# EAGLE board Light2021 (EAGLE 9.6.2)
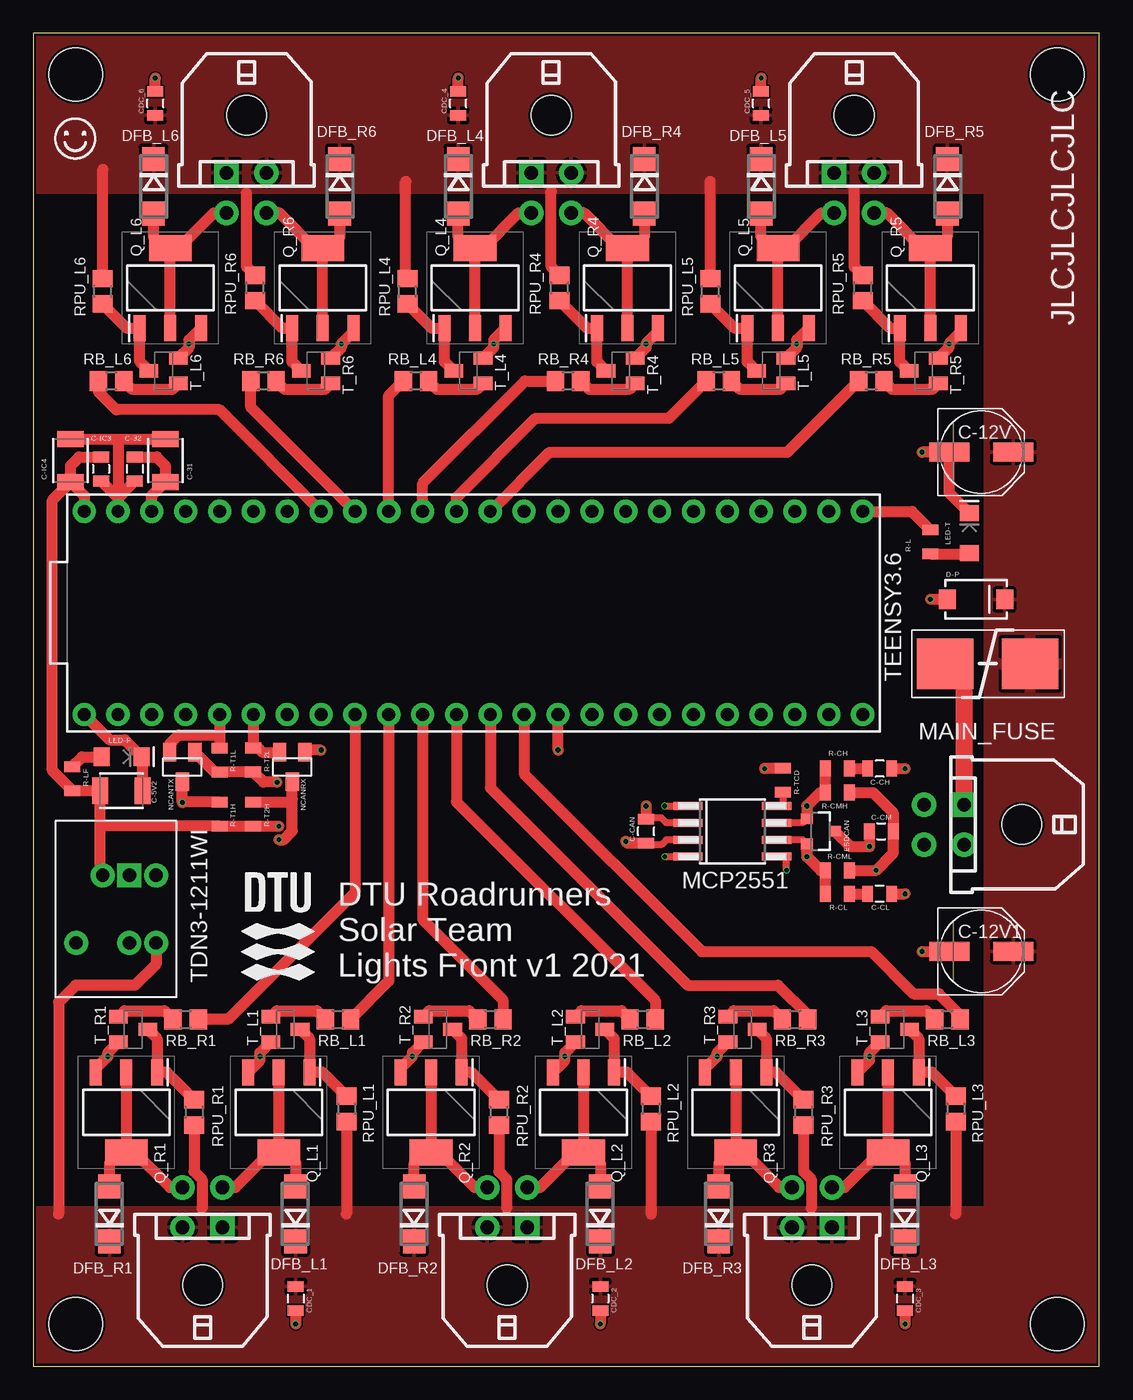
[diagram p0: board, top side]
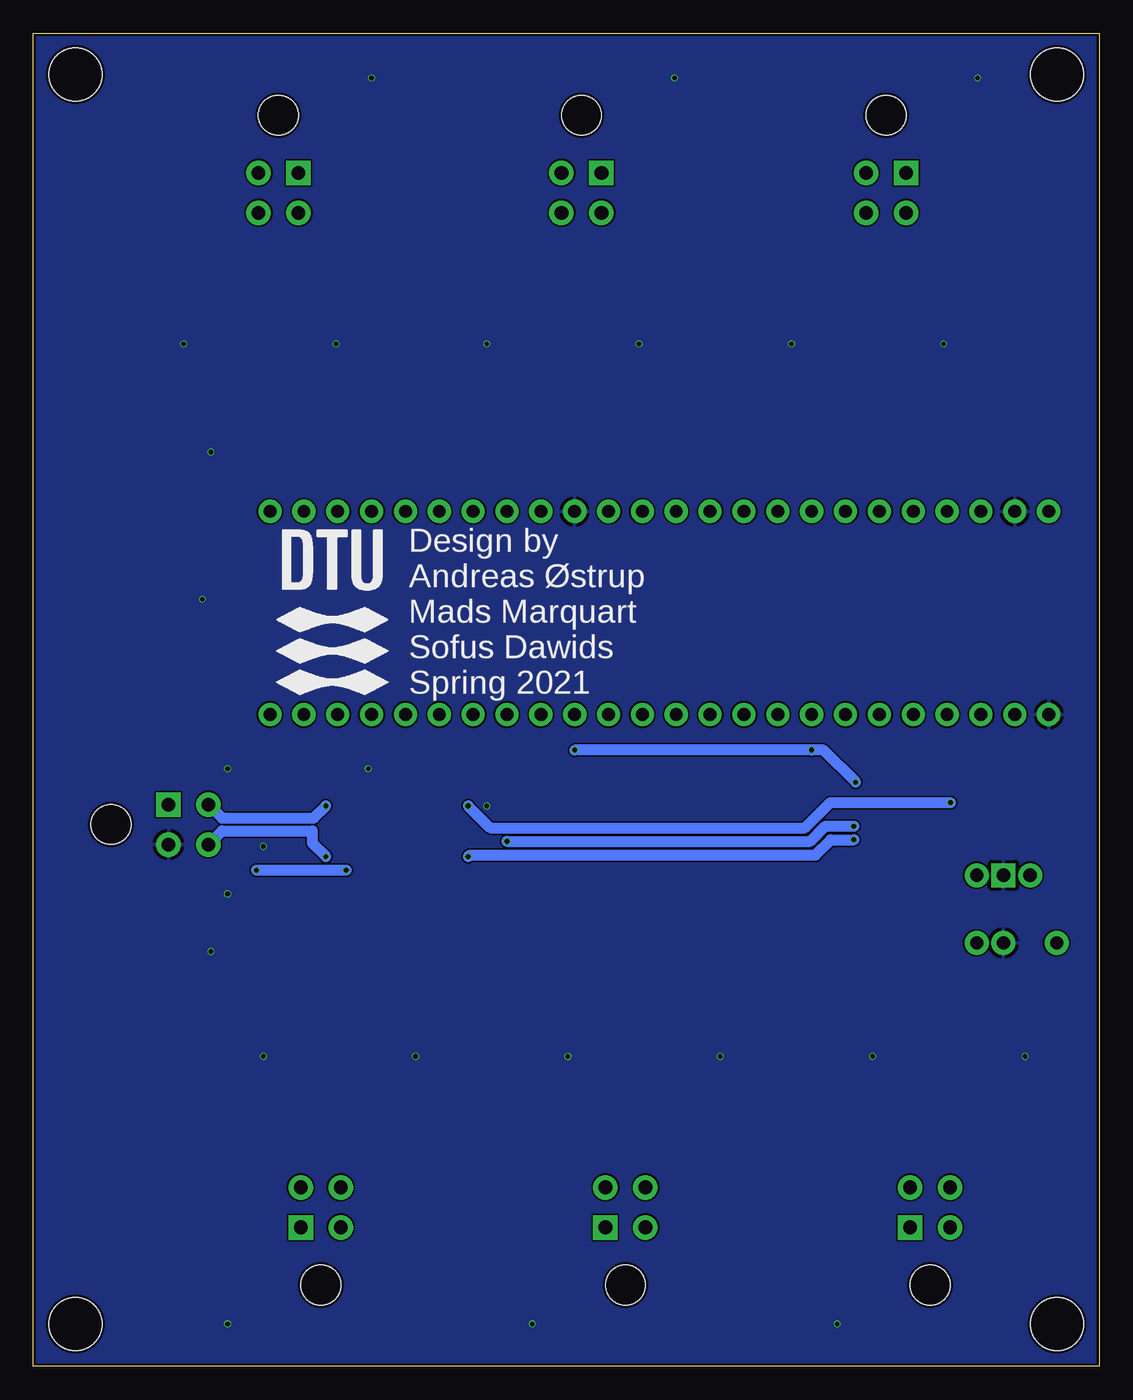
[diagram p1: board, bottom side, seen from below]

Size 79.99 x 100 mm. Coordinates in mm from the lower left corner, seen from the top.
Outline: 0,0 79.99,0 79.99,100 0,100 0,0
Copper layers (1*16): Top 0.035mm / dielectric 1.6mm / Bottom 0.035mm
Design rules "jlcpcb-2layers": minimum track width 5mil, minimum drill 0.3mm, track to track 5mil, track to pad 5mil, pad to pad 5mil, via to via 5mil, smd to smd 5mil, copper to edge 0.2mm, drill to drill 6mil, minimum pad ring 10mil, minimum via ring 3mil, stop-mask expansion 4mil, vias tented up to drill 0mil, thermal gap 10mil
Net classes: 1 diff_pairs: width 0.406 mm
Holes 4 mm at 3.17,3.17 76.83,3.17 76.83,96.9 3.17,96.9

## Footprints (pad centres in the part's own frame; a part is rotated, then mirrored left to right if it is on the bottom)
1210 = smd 1.2 x 2: 1 -1.6,0; 2 1.6,0
PANASONIC_D = smd 3 x 1.4: + 2.4,0; - -2.4,0
0805 = smd 0.8 x 1.2: 1 -0.9,0; 2 0.9,0
43045-0400 = drill 1.02 square: P$1 1.5,4.32 | drill 1.02: P$2 -1.5,4.32; P$3 1.5,7.32; P$4 -1.5,7.32 | hole 3: 0,0
SMA-DIODE = smd 1.27 x 1.47: A -2.15,0; C 2.15,0
DO214AC = smd 1.8 x 1.7: A 2.05,0; C -2.05,0
SOT23-3 = smd 0.8 x 0.9: 1 -0.95,-1; 2 0.95,-1; 3 0,1.1
LED-1206 = smd 1.2 x 1.4: A -1.5,0; C 1.5,0
SMF_OMNI-BLOK_FUSE_BLOCK = smd 4.242 x 3.81: PIN1 -3.175,0; PIN2 3.2,0
SO-08M = smd 0.6 x 2.2: 1 -1.905,-3.33; 2 -0.635,-3.33; 3 0.635,-3.33; 4 1.905,-3.33; 5 1.905,3.33; 6 0.635,3.33; 7 -0.635,3.33; 8 -1.905,3.33
SOT23 = smd 1 x 1.4: 1 -0.95,-1.1; 2 0.95,-1.1; 3 0,1.1
SOT230P700X180-4N = smd 1.95 x 0.9: 1 -3,2.3; 2 -3,0; 3 -3,-2.3 | smd 1.95 x 3.2: 4 3,0
R0805 = smd 1.3 x 1.5: 1 -0.95,0; 2 0.95,0
SOT23-BEC = smd 1 x 1.4: B -0.95,-1.1; C 0,1.1; E 0.95,-1.1
TDC3WI = drill 1 pad 1.6: NC 4.065,7.55; ONOFF 9.135,1.55; VIN+ 9.135,7.55; VIN- 9.135,5.55; VOUT+ 4.065,3.55 | drill 1 pad 1.6 square: VOUT- 4.065,5.55
TEENSY_3.6_DIL = drill 0.965: 0 -7.62,25.4; 1 -7.62,22.86; 2 -7.62,20.32; 3 -7.62,17.78; 3.3V1 7.62,22.86; 3.3V2 -7.62,-7.62; 4 -7.62,15.24; 5 -7.62,12.7; 6 -7.62,10.16; 7 -7.62,7.62; 8 -7.62,5.08; 9 -7.62,2.54; 10 -7.62,0; 11 -7.62,-2.54; 12 -7.62,-5.08; 13 7.62,-5.08; 14/A0 7.62,-2.54; 15/A1 7.62,0; 16/A2 7.62,2.54; 17/A3 7.62,5.08; 18/A4 7.62,7.62; 19/A5 7.62,10.16; 20/A6 7.62,12.7; 21/A7 7.62,15.24; 22/A8 7.62,17.78; 23/A9 7.62,20.32; 24 -7.62,-10.16; 25 -7.62,-12.7; 26 -7.62,-15.24; 27 -7.62,-17.78; 28 -7.62,-20.32; 29 -7.62,-22.86; 30 -7.62,-25.4; 31/A12 -7.62,-27.94; 32/A13 -7.62,-30.48; 33/A14 7.62,-30.48; 34/A15 7.62,-27.94; 35/A16 7.62,-25.4; 36/A17 7.62,-22.86; 37/A18 7.62,-20.32; 38/A19 7.62,-17.78; 39/A20 7.62,-15.24; A21 7.62,-12.7; A22 7.62,-10.16; AGND 7.62,25.4; GND -7.62,27.94; GND1 7.62,-7.62; VIN 7.62,27.94

## Placement (x,y rotation side)
C-5V2  4.7uF  [1210]  6.6,43.18 0 top
C-12V  220uF  [PANASONIC_D]  71.12,68.58 0 top
C-12V1  220uF  [PANASONIC_D]  71.12,31.11 0 top
C-31  4.7uF  [1210]  9.91,67.94 90 top
C-32  100nF  [0805]  7.62,67.31 270 top
C-CAN  100nF  [0805]  45.97,40.13 90 top
C-CH  220pF  [0805]  63.5,44.83 180 top
C-CL  220pF  [0805]  63.5,35.43 180 top
C-CM  NC  [0805]  63.63,40.13 0 top
C-IC3  100nF  [0805]  5.08,67.31 270 top
C-IC4  4.7uF  [1210]  2.79,67.94 90 top
CDC_1  100nF  [0805]  19.68,5.08 270 top
CDC_2  100nF  [0805]  42.55,5.08 270 top
CDC_3  100nF  [0805]  65.41,5.08 270 top
CDC_4  100nF  [0805]  31.88,94.74 90 top
CDC_5  100nF  [0805]  54.61,94.74 90 top
CDC_6  100nF  [0805]  9.14,94.74 90 top
CONN_OUT1  [43045-0400]  12.7,6.1 0 top
CONN_OUT2  [43045-0400]  35.56,6.1 0 top
CONN_OUT3  [43045-0400]  58.42,6.1 0 top
CONN_OUT4  [43045-0400]  38.86,93.85 180 top
CONN_OUT5  [43045-0400]  61.59,93.85 180 top
CONN_OUT6  [43045-0400]  16,93.85 180 top
D-P  ES1B  [SMA-DIODE]  70.74,57.53 0 top
DFB_L1  STTH102  [DO214AC]  19.68,11.43 90 top
DFB_L2  STTH102  [DO214AC]  42.55,11.43 90 top
DFB_L3  STTH102  [DO214AC]  65.41,11.43 90 top
DFB_L4  STTH102  [DO214AC]  31.88,88.52 270 top
DFB_L5  STTH102  [DO214AC]  54.61,88.52 270 top
DFB_L6  STTH102  [DO214AC]  9.02,88.52 270 top
DFB_R1  STTH102  [DO214AC]  5.71,11.43 90 top
DFB_R2  STTH102  [DO214AC]  28.57,11.43 90 top
DFB_R3  STTH102  [DO214AC]  51.44,11.43 90 top
DFB_R4  STTH102  [DO214AC]  45.85,88.52 270 top
DFB_R5  STTH102  [DO214AC]  68.58,88.52 270 top
DFB_R6  STTH102  [DO214AC]  22.99,88.52 270 top
ESDCAN  PESD1CAN  [SOT23-3]  59.05,40.13 270 top
LED-F  RED  [LED-1206]  6.63,45.72 0 top
LED-T  RED  [LED-1206]  70.23,62.51 90 top
MAIN_FUSE  SMF_OMNI-BLOK_FUSE_BLOCK  [SMF_OMNI-BLOK_FUSE_BLOCK]  71.63,52.7 180 top
MCP2551  MCP2551  [SO-08M]  52.45,40.13 270 top
NCANRX  BSS138  [SOT23]  19.43,44.96 180 top
NCANTX  BSS138  [SOT23]  11.18,44.96 180 top
P_D  [43045-0400]  74.17,40.64 90 top
Q_L1  BUK9832-55A  [SOT230P700X180-4N]  18.41,19.05 270 top
Q_L2  BUK9832-55A  [SOT230P700X180-4N]  41.27,19.05 270 top
Q_L3  BUK9832-55A  [SOT230P700X180-4N]  64.14,19.05 270 top
Q_L4  BUK9832-55A  [SOT230P700X180-4N]  33.15,80.9 90 top
Q_L5  BUK9832-55A  [SOT230P700X180-4N]  55.88,80.9 90 top
Q_L6  BUK9832-55A  [SOT230P700X180-4N]  10.29,80.9 90 top
Q_R1  BUK9832-55A  [SOT230P700X180-4N]  6.99,19.05 270 top
Q_R2  BUK9832-55A  [SOT230P700X180-4N]  29.84,19.05 270 top
Q_R3  BUK9832-55A  [SOT230P700X180-4N]  52.7,19.05 270 top
Q_R4  BUK9832-55A  [SOT230P700X180-4N]  44.58,80.9 90 top
Q_R5  BUK9832-55A  [SOT230P700X180-4N]  67.31,80.9 90 top
Q_R6  BUK9832-55A  [SOT230P700X180-4N]  21.72,80.9 90 top
R-CH  100  [0805]  60.34,44.83 180 top
R-CL  100  [0805]  60.34,35.43 180 top
R-CMH  NC  [0805]  60.33,43.04 180 top
R-CML  NC  [0805]  60.33,37.2 0 top
R-L  560  [0805]  67.31,61.85 90 top
R-LF  1.2k  [0805]  2.92,44.08 270 top
R-T1H  10k  [0805]  13.97,41.41 270 top
R-T1L  10k  [0805]  13.97,45.47 270 top
R-T2H  10k  [0805]  16.51,41.41 270 top
R-T2L  10k  [0805]  16.51,45.48 270 top
R-TCD  4.7k  [0805]  56.26,43.95 270 top
RB_L1  4k7  [R0805]  22.86,26.04 0 top
RB_L2  4k7  [R0805]  45.72,26.04 0 top
RB_L3  4k7  [R0805]  68.58,26.04 0 top
RB_L4  4k7  [R0805]  28.7,73.91 180 top
RB_L5  4k7  [R0805]  51.44,73.91 180 top
RB_L6  4k7  [R0805]  5.84,73.91 180 top
RB_R1  4k7  [R0805]  11.43,26.04 0 top
RB_R2  4k7  [R0805]  34.29,26.04 0 top
RB_R3  4k7  [R0805]  57.15,26.04 0 top
RB_R4  4k7  [R0805]  40.13,73.91 180 top
RB_R5  4k7  [R0805]  62.87,73.91 180 top
RB_R6  4k7  [R0805]  17.27,73.91 180 top
RPU_L1  10k  [R0805]  23.5,19.3 270 top
RPU_L2  10k  [R0805]  46.35,19.3 270 top
RPU_L3  10k  [R0805]  69.22,19.3 270 top
RPU_L4  10k  [R0805]  28.07,80.64 90 top
RPU_L5  10k  [R0805]  50.8,80.64 90 top
RPU_L6  10k  [R0805]  5.21,80.64 90 top
RPU_R1  10k  [R0805]  12.06,19.05 270 top
RPU_R2  10k  [R0805]  34.92,19.05 270 top
RPU_R3  10k  [R0805]  57.78,19.05 270 top
RPU_R4  10k  [R0805]  39.5,80.9 90 top
RPU_R5  10k  [R0805]  62.23,80.9 90 top
RPU_R6  10k  [R0805]  16.64,80.9 90 top
T_L1  BC846B  [SOT23-BEC]  18.92,25.27 270 top
T_L2  BC846B  [SOT23-BEC]  41.78,25.27 270 top
T_L3  BC846B  [SOT23-BEC]  64.64,25.27 270 top
T_L4  BC846B  [SOT23-BEC]  32.64,74.68 90 top
T_L5  BC846B  [SOT23-BEC]  55.37,74.68 90 top
T_L6  BC846B  [SOT23-BEC]  9.78,74.68 90 top
T_R1  BC846B  [SOT23-BEC]  7.49,25.27 270 top
T_R2  BC846B  [SOT23-BEC]  30.35,25.27 270 top
T_R3  BC846B  [SOT23-BEC]  53.21,25.27 270 top
T_R4  BC846B  [SOT23-BEC]  44.07,74.68 90 top
T_R5  BC846B  [SOT23-BEC]  66.8,74.68 90 top
T_R6  BC846B  [SOT23-BEC]  21.21,74.68 90 top
TDN3-1211WI  TDN3WI  [TDC3WI]  1.65,40.89 270 top
TEENSY3.6  TEENSY_3.6_DIL  [TEENSY_3.6_DIL]  31.75,56.52 90 top
U$1  [DTU-SMALL-5MM]  18.41,33.66 0 top
U$2  [SMILEY]  3.17,92.08 0 top
U$3  [DTU-MEDIUM-9MM-BOTTOM]  57.53,57.28 0 bottom

## Library data of the parts
C-5V2 C-31 C-32 C-CAN C-CH C-CL C-CM C-IC3 C-IC4 CDC_1-CDC_6 = SparkFun-Passives
C-12V C-12V1 = rcl
CONN_OUT1-CONN_OUT6 P_D = con-molex-micro-fit-3_0
D-P = SparkFun-DiscreteSemi
DFB_L1-DFB_L6 DFB_R1-DFB_R6 = diode
ESDCAN = SparkFun-DiscreteSemi; PROD_ID: DIO-12501
LED-F LED-T = SparkFun-LED
MAIN_FUSE = SMF_OMNI-BLOK_FUSE_BLOCK
MCP2551 = skpang_lib
NCANRX NCANTX = SparkFun-DiscreteSemi; PROD_ID: TRANS-08345
Q_L1-Q_L6 Q_R1-Q_R6 = custom; DESCRIPTION: MOSFET N-channel TrenchMOS logic level FET; HEIGHT: 1.8mm; MANUFACTURER_NAME: Nexperia; MANUFACTURER_PART_NUMBER: BUK9832-55A/CUX; MOUSER_PART_NUMBER: 771-BUK9832-55A/CUX; MOUSER_PRICE-STOCK: https://www.mouser.co.uk/ProductDetail/Nexperia/BUK9832-55A-CUX?qs=Yna0arPQ0CQmqEEmts1kDA%3D%3D
R-CH R-CL R-CMH R-CML R-L R-LF R-T1H R-T1L R-T2H R-T2L R-TCD = SparkFun-Resistors
RB_L1-RB_L6 RB_R1-RB_R6 RPU_L1-RPU_L6 RPU_R1-RPU_R6 = rcl; SPICEPREFIX: R
T_L1-T_L6 T_R1-T_R6 = transistor
TDN3-1211WI = TracoTDN3WI
TEENSY3.6 = Teensy_3_and_LC_Series_Boards_v1.4
U$1-U$3 = Logos

## Nets
+3V3: C-31.1 C-32.1 NCANRX.1 NCANTX.1 R-T1L.2 R-T2L.2 TEENSY3.6.3.3V1 TEENSY3.6.3.3V2
+5V: C-5V2.1 C-CAN.1 C-IC3.1 C-IC4.1 MCP2551.3 R-LF.2 R-T1H.2 R-T2H.2 TDN3-1211WI.VOUT+ TEENSY3.6.VIN
+12V: C-12V1.+ C-12V.+ CDC_1.1 CDC_2.1 CDC_3.1 CDC_4.1 CDC_5.1 CDC_6.1 CONN_OUT1.P$1 CONN_OUT1.P$2 CONN_OUT2.P$1 CONN_OUT2.P$2 CONN_OUT3.P$1 CONN_OUT3.P$2 CONN_OUT4.P$1 CONN_OUT4.P$2 CONN_OUT5.P$1 CONN_OUT5.P$2 CONN_OUT6.P$1 CONN_OUT6.P$2 D-P.C DFB_L1.C DFB_L2.C DFB_L3.C DFB_L4.C DFB_L5.C DFB_L6.C DFB_R1.C DFB_R2.C DFB_R3.C DFB_R4.C DFB_R5.C DFB_R6.C MAIN_FUSE.PIN1 RPU_L1.2 RPU_L2.2 RPU_L3.2 RPU_L4.2 RPU_L5.2 RPU_L6.2 RPU_R1.2 RPU_R2.2 RPU_R3.2 RPU_R4.2 RPU_R5.2 RPU_R6.2 TDN3-1211WI.VIN+
CAN-RXD: MCP2551.4 NCANRX.3 R-T2H.1
CAN-RXD-3V3: NCANRX.2 R-T2L.1 TEENSY3.6.4
CAN-TXD: MCP2551.1 NCANTX.3 R-T1H.1
CAN-TXD-3V3: NCANTX.2 R-T1L.1 TEENSY3.6.3
CANH [diff_pairs]: ESDCAN.1 MCP2551.7 P_D.P$3 R-CH.2 R-CMH.2
CANL [diff_pairs]: ESDCAN.2 MCP2551.6 P_D.P$4 R-CL.2 R-CML.1
CLK: TEENSY3.6.13
GND: C-5V2.2 C-12V1.- C-12V.- C-31.2 C-32.2 C-CAN.2 C-CH.1 C-CL.1 C-CM.1 C-IC3.2 C-IC4.2 CDC_1.2 CDC_2.2 CDC_3.2 CDC_4.2 CDC_5.2 CDC_6.2 D-P.A ESDCAN.3 LED-F.C LED-T.C MCP2551.2 P_D.P$2 Q_L1.3 Q_L2.3 Q_L3.3 Q_L4.3 Q_L5.3 Q_L6.3 Q_R1.3 Q_R2.3 Q_R3.3 Q_R4.3 Q_R5.3 Q_R6.3 R-TCD.1 T_L1.E T_L2.E T_L3.E T_L4.E T_L5.E T_L6.E T_R1.E T_R2.E T_R3.E T_R4.E T_R5.E T_R6.E TDN3-1211WI.VIN- TDN3-1211WI.VOUT- TEENSY3.6.AGND TEENSY3.6.GND TEENSY3.6.GND1
N$1: LED-T.A R-L.1
N$6: C-CM.2 MCP2551.5 R-CMH.1 R-CML.2
N$7: RB_L1.1 T_L1.B
N$8: Q_L1.1 RPU_L1.1 T_L1.C
N$9: RB_R1.1 T_R1.B
N$10: Q_R1.1 RPU_R1.1 T_R1.C
N$11: RB_L2.1 T_L2.B
N$12: LED-F.A R-LF.1
N$13: Q_L2.1 RPU_L2.1 T_L2.C
N$14: RB_R2.1 T_R2.B
N$15: Q_R2.1 RPU_R2.1 T_R2.C
N$16: RB_L3.1 T_L3.B
N$17: Q_L3.1 RPU_L3.1 T_L3.C
N$18: RB_R3.1 T_R3.B
N$19: Q_R3.1 RPU_R3.1 T_R3.C
N$24: RB_L4.1 T_L4.B
N$25: C-CL.2 R-CL.1
N$26: C-CH.2 R-CH.1
N$27: Q_L4.1 RPU_L4.1 T_L4.C
N$28: RB_R4.1 T_R4.B
N$29: Q_R4.1 RPU_R4.1 T_R4.C
N$34: RB_L5.1 T_L5.B
N$35: Q_L5.1 RPU_L5.1 T_L5.C
N$36: RB_R5.1 T_R5.B
N$37: Q_R5.1 RPU_R5.1 T_R5.C
N$42: RB_L6.1 T_L6.B
N$43: Q_L6.1 RPU_L6.1 T_L6.C
N$44: RB_R6.1 T_R6.B
N$45: Q_R6.1 RPU_R6.1 T_R6.C
OUT_L1: RB_L1.2 TEENSY3.6.8
OUT_L2: RB_L2.2 TEENSY3.6.10
OUT_L3: RB_L3.2 TEENSY3.6.12
OUT_L4: RB_L4.2 TEENSY3.6.17/A3
OUT_L5: RB_L5.2 TEENSY3.6.15/A1
OUT_L6: RB_L6.2 TEENSY3.6.19/A5
OUT_R1: RB_R1.2 TEENSY3.6.7
OUT_R2: RB_R2.2 TEENSY3.6.9
OUT_R3: RB_R3.2 TEENSY3.6.11
OUT_R4: RB_R4.2 TEENSY3.6.16/A2
OUT_R5: RB_R5.2 TEENSY3.6.14/A0
OUT_R6: RB_R6.2 TEENSY3.6.18/A4
OUTIO_L1: CONN_OUT1.P$3 DFB_L1.A Q_L1.2 Q_L1.4
OUTIO_L2: CONN_OUT2.P$3 DFB_L2.A Q_L2.2 Q_L2.4
OUTIO_L3: CONN_OUT3.P$3 DFB_L3.A Q_L3.2 Q_L3.4
OUTIO_L4: CONN_OUT4.P$3 DFB_L4.A Q_L4.2 Q_L4.4
OUTIO_L5: CONN_OUT5.P$3 DFB_L5.A Q_L5.2 Q_L5.4
OUTIO_L6: CONN_OUT6.P$3 DFB_L6.A Q_L6.2 Q_L6.4
OUTIO_R1: CONN_OUT1.P$4 DFB_R1.A Q_R1.2 Q_R1.4
OUTIO_R2: CONN_OUT2.P$4 DFB_R2.A Q_R2.2 Q_R2.4
OUTIO_R3: CONN_OUT3.P$4 DFB_R3.A Q_R3.2 Q_R3.4
OUTIO_R4: CONN_OUT4.P$4 DFB_R4.A Q_R4.2 Q_R4.4
OUTIO_R5: CONN_OUT5.P$4 DFB_R5.A Q_R5.2 Q_R5.4
OUTIO_R6: CONN_OUT6.P$4 DFB_R6.A Q_R6.2 Q_R6.4
RS: MCP2551.8 R-TCD.2
TESTLED: R-L.2 TEENSY3.6.33/A14
VDD: MAIN_FUSE.PIN2 P_D.P$1

## Tracks (layer width: path | path; a pad name or v marks a point on that pad's centre or on a via)
+3V3  (via drill 0.35)
  Top 0.813: v21.59,46.23 20.55,46.23 NCANRX.1 | v18.29,43.81 17.27,43.81 R-T2L.2 R-T1L.2 13.62,44.57 NCANTX.1 | v39.37,46.23 TEENSY3.6.3.3V2 | TEENSY3.6.3.3V1 8.89,65.33 C-31.1 9.91,67.56 9.26,68.21 C-32.1
  Bottom 0.813: v39.37,46.23 v21.59,46.23 20.7,46.23 v18.29,43.81
+5V  (via drill 0.35)
  Top 0.508: MCP2551.3 47.5,39.5 47.12,39.12 46.09,39.12 C-CAN.1
  Top 0.813: C-IC4.1 2.79,67.56 3.44,68.21 C-IC3.1 | C-IC4.1 3.81,65.33 TEENSY3.6.VIN | C-IC4.1 1.42,64.97 1.42,44.68 R-LF.2 C-5V2.1 5,40.64 | TDN3-1211WI.VOUT+ 5,37.03 5,40.64 | C-CAN.1 44.59,39.23 v44.45,39.37 | v18.41,40.51 R-T2H.2 R-T1H.2 5.13,40.51 5,40.64
  Bottom 0.813: v44.45,39.37 21.7,39.37 20.56,40.51 v18.41,40.51
+12V
  Top 0.813: RPU_L6.2 5.21,89.79 | TDN3-1211WI.VIN+ 9.2,30.16 7.62,28.57 3.17,28.57 1.91,27.3 1.91,11.43 | RPU_L3.2 69.22,11.43 | RPU_R3.2 57.78,14.6 58.37,14.02 58.37,11.86 | RPU_L2.2 46.35,11.43 | RPU_R2.2 34.92,14.6 35.51,14.02 35.51,11.86 | RPU_L1.2 23.5,11.43 | RPU_R1.2 12.06,14.6 12.65,14.02 12.65,11.86 | RPU_L4.2 27.94,81.72 27.94,88.9 | RPU_L5.2 50.8,88.9 | RPU_R5.2 61.59,82.48 61.59,88.27 | RPU_R4.2 38.86,82.48 38.86,88.14 | RPU_R6.2 16,82.48 16,88.01
  pour Top: 0,11.94 26.67,11.94 26.67,0 0,0
  pour Top: 24.77,11.94 49.53,11.94 49.53,0 24.77,0
  pour Top: 47.62,11.94 72.39,11.94 72.39,0 47.62,0
  pour Top: 49.66,88.01 24.89,88.01 24.89,99.95 49.66,99.95
  pour Top: 72.39,88.01 47.62,88.01 47.62,99.95 72.39,99.95
  pour Top: 26.8,88.01 -0.51,88.01 -0.51,99.95 26.8,99.95
  pour Top (rank 2): 71.37,-2.41 82.55,-2.41 82.55,100.97 71.37,100.97
  pour Top: 71.88,55.88 78.11,55.88 78.11,49.53 71.88,49.53
CAN-RXD  (via drill 0.35)
  Top 0.508: v47.37,38.23 MCP2551.4
  Top 0.813: v18.41,39.5 18.76,39.5 19.43,40.16 19.43,42.55 | 19.43,42.55 NCANRX.3 | R-T2H.1 19.2,42.31 19.43,42.55
  Bottom 0.813: v47.37,38.23 47.24,38.35 21.3,38.35 20.16,39.5 v18.41,39.5
CAN-RXD-3V3
  Top 0.813: NCANRX.2 17.21,46.06 16.89,46.38 R-T2L.1 TEENSY3.6.4
CAN-TXD  (via drill 0.35)
  Top 0.508: v47.37,42.04 MCP2551.1
  Top 0.813: R-T1H.1 11.2,42.31 v11.18,42.29 NCANTX.3
  Bottom 0.813: v47.37,42.04 45.72,40.39 22.1,40.39 20.19,42.29 v11.18,42.29
CAN-TXD-3V3
  Top 0.813: TEENSY3.6.3 13.97,47.37 | 13.97,47.37 R-T1L.1 | NCANTX.2 10.23,46.67 10.92,47.37 13.97,47.37
CANH  (via drill 0.35)
  Top 0.508: ESDCAN.1 57.74,40.77 MCP2551.7
  Top 0.813: R-CH.2 59.42,44.82 R-CMH.2 59.04,43.04 v58.04,42.04 58.05,42.02 ESDCAN.1
  Bottom 0.813: P_D.P$3 65.83,41.12 58.95,41.12 v58.04,42.04
CANL  (via drill 0.35)
  Top 0.508: ESDCAN.2 57.74,39.5 MCP2551.6
  Top 0.813: R-CL.2 R-CML.1 | R-CML.1 | ESDCAN.2 58.05,38.57 58.04,38.55 v58.04,38.23 59.08,37.19 R-CML.1
  Bottom 0.813: P_D.P$4 65.83,40.16 59.05,40.16 59.05,39.24 v58.04,38.23
GND  (via drill 0.35)
  Top 0.508: C-CAN.2 46.09,41.15 47.12,41.15 47.5,40.77 MCP2551.2
  Top 0.813: Q_R1.3 4.68,22.34 v5.59,23.24 5.59,23.52 T_R1.E | Q_L1.3 17.02,22.95 v17.02,23.24 17.02,23.52 T_L1.E | Q_R2.3 27.55,22.34 v28.45,23.24 28.45,23.52 T_R2.E | Q_L2.3 39.88,22.95 v39.88,23.24 39.88,23.52 T_L2.E | Q_R3.3 50.41,22.34 v51.31,23.24 51.31,23.52 T_R3.E | Q_L3.3 62.74,22.95 v62.74,23.24 62.74,23.52 T_L3.E | Q_R4.3 46.88,77.61 v45.97,76.71 45.97,76.43 T_R4.E | Q_L4.3 34.54,77 v34.54,76.71 34.54,76.43 T_L4.E | Q_R5.3 69.61,77.61 v68.71,76.71 68.71,76.43 T_R5.E | Q_L5.3 57.28,77 v57.28,76.71 57.28,76.43 T_L5.E | Q_R6.3 24.02,77.61 v23.11,76.71 23.11,76.43 T_R6.E | Q_L6.3 11.68,77 v11.68,76.71 11.68,76.43 T_L6.E | D-P.A v67.31,57.53 | v66.67,68.58 C-12V.- 68.72,65.52 LED-T.C | ESDCAN.3 61.3,38.99 v62.74,38.99 C-CM.1 | v45.97,42.04 C-CAN.2 | C-IC3.2 6.35,65.14 | 6.35,65.14 TEENSY3.6.AGND | C-32.2 6.35,65.14 | C-IC4.2 6.35,69.55 | 6.35,69.55 C-31.2 | 6.35,69.55 6.35,65.14 | C-5V2.2 8.2,45.64 LED-F.C 6.86,46.99 5.71,46.99 TEENSY3.6.GND | C-CH.1 v65.41,44.83 | C-CL.1 v65.41,35.43 | R-TCD.1 54.89,44.85 v54.86,44.83 | v66.67,31.11 C-12V1.- | CDC_5.2 v54.61,96.65 | CDC_4.2 v31.88,96.65 | CDC_6.2 v9.14,96.65 | CDC_1.2 v19.68,3.17 | CDC_2.2 v42.55,3.17 | CDC_3.2 v65.41,3.17
  pour Bottom: -0.64,100.97 80.64,100.97 80.64,-1.91 -0.64,-1.91
N$1
  Top 0.813: R-L.1 70.17,60.95 LED-T.A
N$6  (via drill 0.35)
  Top 0.508: v56.52,37.21 56.52,38.1 56.39,38.23 MCP2551.5
  Top 0.813: R-CMH.1 63,43.04 64.53,41.52 C-CM.2 64.53,38.49 v63.25,37.21 63.23,37.2 R-CML.2
  Bottom 0.813: v56.52,37.21 v63.25,37.21
N$7
  Top 0.813: T_L1.B 18.27,26.67 21.27,26.67 RB_L1.1
N$8
  Top 0.813: T_L1.C 20.71,24.58 Q_L1.1 21.7,22.05 RPU_L1.1
N$9
  Top 0.813: T_R1.B 6.84,26.67 9.85,26.67 RB_R1.1
N$10
  Top 0.813: T_R1.C 9.29,24.58 Q_R1.1 10.02,22.05 RPU_R1.1
N$11
  Top 0.813: T_L2.B 41.13,26.67 44.13,26.67 RB_L2.1
N$12
  Top 0.813: R-LF.1 3.66,45.72 LED-F.A
N$13
  Top 0.813: T_L2.C 43.58,24.58 Q_L2.1 44.56,22.05 RPU_L2.1
N$14
  Top 0.813: T_R2.B 29.7,26.67 32.7,26.67 RB_R2.1
N$15
  Top 0.813: T_R2.C 32.15,24.58 Q_R2.1 32.88,22.05 RPU_R2.1
N$16
  Top 0.813: T_L3.B 63.99,26.67 67,26.67 RB_L3.1
N$17
  Top 0.813: T_L3.C 66.44,24.58 Q_L3.1 67.42,22.05 RPU_L3.1
N$18
  Top 0.813: T_R3.B 52.56,26.67 55.56,26.67 RB_R3.1
N$19
  Top 0.813: T_R3.C 55.01,24.58 Q_R3.1 55.73,22.05 RPU_R3.1
N$24
  Top 0.813: T_L4.B 33.29,73.28 30.29,73.28 RB_L4.1
N$25
  Top 0.813: R-CL.1 C-CL.2
N$26
  Top 0.813: R-CH.1 C-CH.2
N$27
  Top 0.813: T_L4.C 30.85,75.37 Q_L4.1 29.86,77.9 RPU_L4.1
N$28
  Top 0.813: T_R4.B 44.72,73.28 41.72,73.28 RB_R4.1
N$29
  Top 0.813: T_R4.C 42.28,75.37 Q_R4.1 41.55,77.9 RPU_R4.1
N$34
  Top 0.813: T_L5.B 56.02,73.28 53.02,73.28 RB_L5.1
N$35
  Top 0.813: T_L5.C 53.58,75.37 Q_L5.1 52.6,77.9 RPU_L5.1
N$36
  Top 0.813: T_R5.B 67.45,73.28 64.45,73.28 RB_R5.1
N$37
  Top 0.813: T_R5.C 65.01,75.37 Q_R5.1 64.28,77.9 RPU_R5.1
N$42
  Top 0.813: T_L6.B 10.43,73.28 7.43,73.28 RB_L6.1
N$43
  Top 0.813: T_L6.C 7.99,75.37 Q_L6.1 7,77.9 RPU_L6.1
N$44
  Top 0.813: T_R6.B 21.86,73.28 18.86,73.28 RB_R6.1
N$45
  Top 0.813: T_R6.C 19.42,75.37 Q_R6.1 18.69,77.9 RPU_R6.1
OUT_L1
  Top 0.813: RB_L1.2 26.67,28.89 TEENSY3.6.8
OUT_L2
  Top 0.813: TEENSY3.6.10 31.75,42.35 46.67,27.43 RB_L2.2
OUT_L3
  Top 0.813: TEENSY3.6.12 36.83,44.45 50.16,31.11 62.87,31.11 66.04,27.94 67.94,27.94 69.53,26.36 RB_L3.2
OUT_L4
  Top 0.813: TEENSY3.6.17/A3 26.67,72.83 RB_L4.2
OUT_L5
  Top 0.813: TEENSY3.6.15/A1 31.75,65.19 37.68,71.12 47.69,71.12 RB_L5.2
OUT_L6
  Top 0.813: TEENSY3.6.19/A5 13.97,71.75 6.22,71.75 4.89,73.09 RB_L6.2
OUT_R1
  Top 0.813: TEENSY3.6.7 24.13,35.56 14.61,26.04 RB_R1.2
OUT_R2
  Top 0.813: RB_R2.2 35.24,27.5 29.21,33.53 TEENSY3.6.9
OUT_R3
  Top 0.813: TEENSY3.6.11 34.29,43.4 49.11,28.57 55.88,28.57 58.1,26.36 RB_R3.2
OUT_R4
  Top 0.813: TEENSY3.6.16/A2 29.21,66.24 36.88,73.91 RB_R4.2
OUT_R5
  Top 0.813: TEENSY3.6.14/A0 38.73,68.58 56.58,68.58 RB_R5.2
OUT_R6
  Top 0.813: TEENSY3.6.18/A4 16.32,71.94 RB_R6.2
OUTIO_L1
  Top 0.813: Q_L1.2 Q_L1.4 | Q_L1.4 17.78,16.05 15.15,13.42 CONN_OUT1.P$3 | DFB_L1.A 19.68,15.24 18.88,16.05 Q_L1.4
OUTIO_L2
  Top 0.813: Q_L2.2 Q_L2.4 | Q_L2.4 40.64,16.05 38.01,13.42 CONN_OUT2.P$3 | DFB_L2.A 42.55,15.24 41.73,16.05 Q_L2.4
OUTIO_L3
  Top 0.813: Q_L3.2 Q_L3.4 | Q_L3.4 63.5,16.05 60.87,13.42 CONN_OUT3.P$3 | DFB_L3.A 65.41,15.24 64.59,16.05 Q_L3.4
OUTIO_L4
  Top 0.813: Q_L4.2 Q_L4.4 | Q_L4.4 33.78,83.9 36.42,86.53 CONN_OUT4.P$3 | DFB_L4.A 31.88,84.71 32.69,83.9 Q_L4.4
OUTIO_L5
  Top 0.813: Q_L5.2 Q_L5.4 | Q_L5.4 56.52,83.9 59.15,86.53 CONN_OUT5.P$3 | DFB_L5.A 54.61,84.71 55.42,83.9 Q_L5.4
OUTIO_L6
  Top 0.813: Q_L6.2 Q_L6.4 | Q_L6.4 10.92,83.9 13.56,86.53 CONN_OUT6.P$3 | DFB_L6.A 9.02,84.71 9.83,83.9 Q_L6.4
OUTIO_R1
  Top 0.813: Q_R1.2 Q_R1.4 | CONN_OUT1.P$4 10.25,13.42 7.62,16.05 Q_R1.4 | DFB_R1.A 5.71,15.24 6.53,16.05 Q_R1.4
OUTIO_R2
  Top 0.813: Q_R2.2 Q_R2.4 | CONN_OUT2.P$4 33.11,13.42 30.48,16.05 Q_R2.4 | DFB_R2.A 28.57,15.24 29.39,16.05 Q_R2.4
OUTIO_R3
  Top 0.813: Q_R3.2 Q_R3.4 | CONN_OUT3.P$4 55.97,13.42 53.34,16.05 Q_R3.4 | DFB_R3.A 51.44,15.24 52.24,16.05 Q_R3.4
OUTIO_R4
  Top 0.813: Q_R4.2 Q_R4.4 | CONN_OUT4.P$4 41.31,86.53 43.94,83.9 Q_R4.4 | DFB_R4.A 45.85,84.71 45.04,83.9 Q_R4.4
OUTIO_R5
  Top 0.813: Q_R5.2 Q_R5.4 | CONN_OUT5.P$4 64.04,86.53 66.67,83.9 Q_R5.4 | DFB_R5.A 68.58,84.71 67.77,83.9 Q_R5.4
OUTIO_R6
  Top 0.813: Q_R6.2 Q_R6.4 | CONN_OUT6.P$4 18.45,86.53 21.08,83.9 Q_R6.4 | DFB_R6.A 22.99,84.71 22.18,83.9 Q_R6.4
RS
  Top 0.508: R-TCD.2 56.26,42.16 56.39,42.04 MCP2551.8
TESTLED
  Top 0.813: TEENSY3.6.33/A14 65.92,64.14 R-L.2
VDD
  Top 1.27: P_D.P$1 69.85,52.7 MAIN_FUSE.PIN2

## Text on the board
tPlace: JLCJLCJLCJLC | DTU Roadrunners / Solar Team / Lights Front v1 2021
bPlace: Design by / Andreas Østrup / Mads Marquart / Sofus Dawids / Spring 2021